# EAGLE board PIC32Circuit (EAGLE 7.5.0)
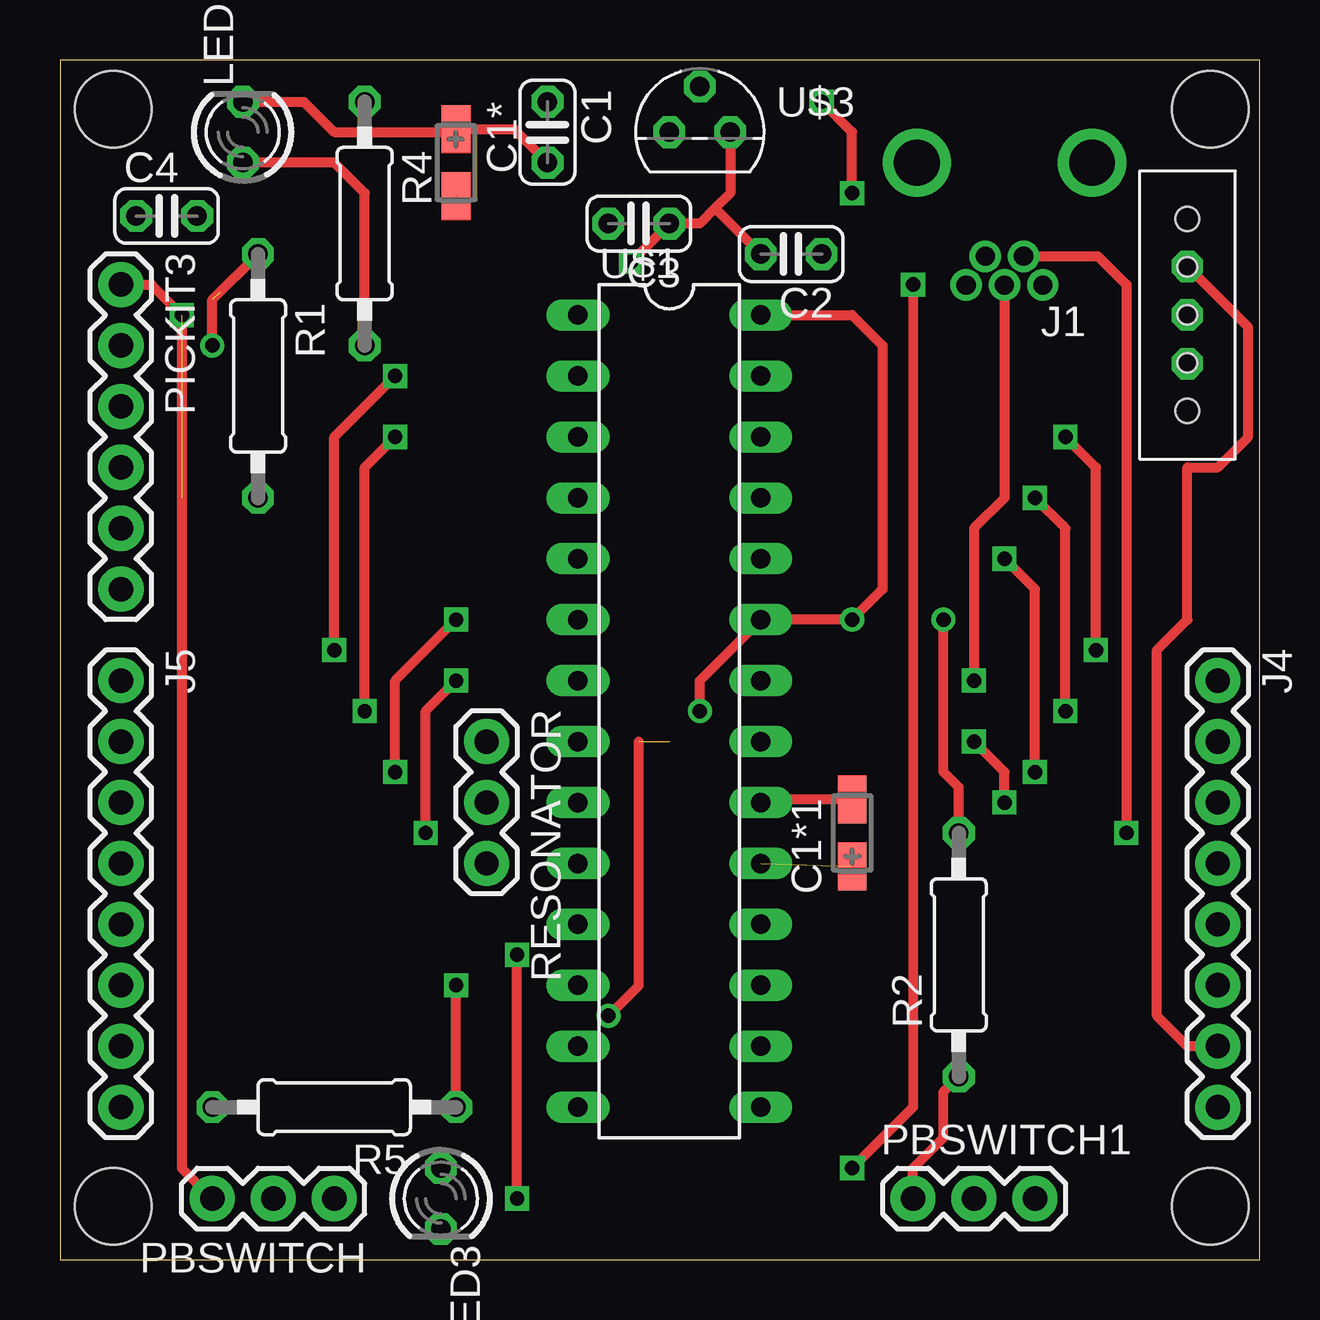
[diagram p0: board, top side]
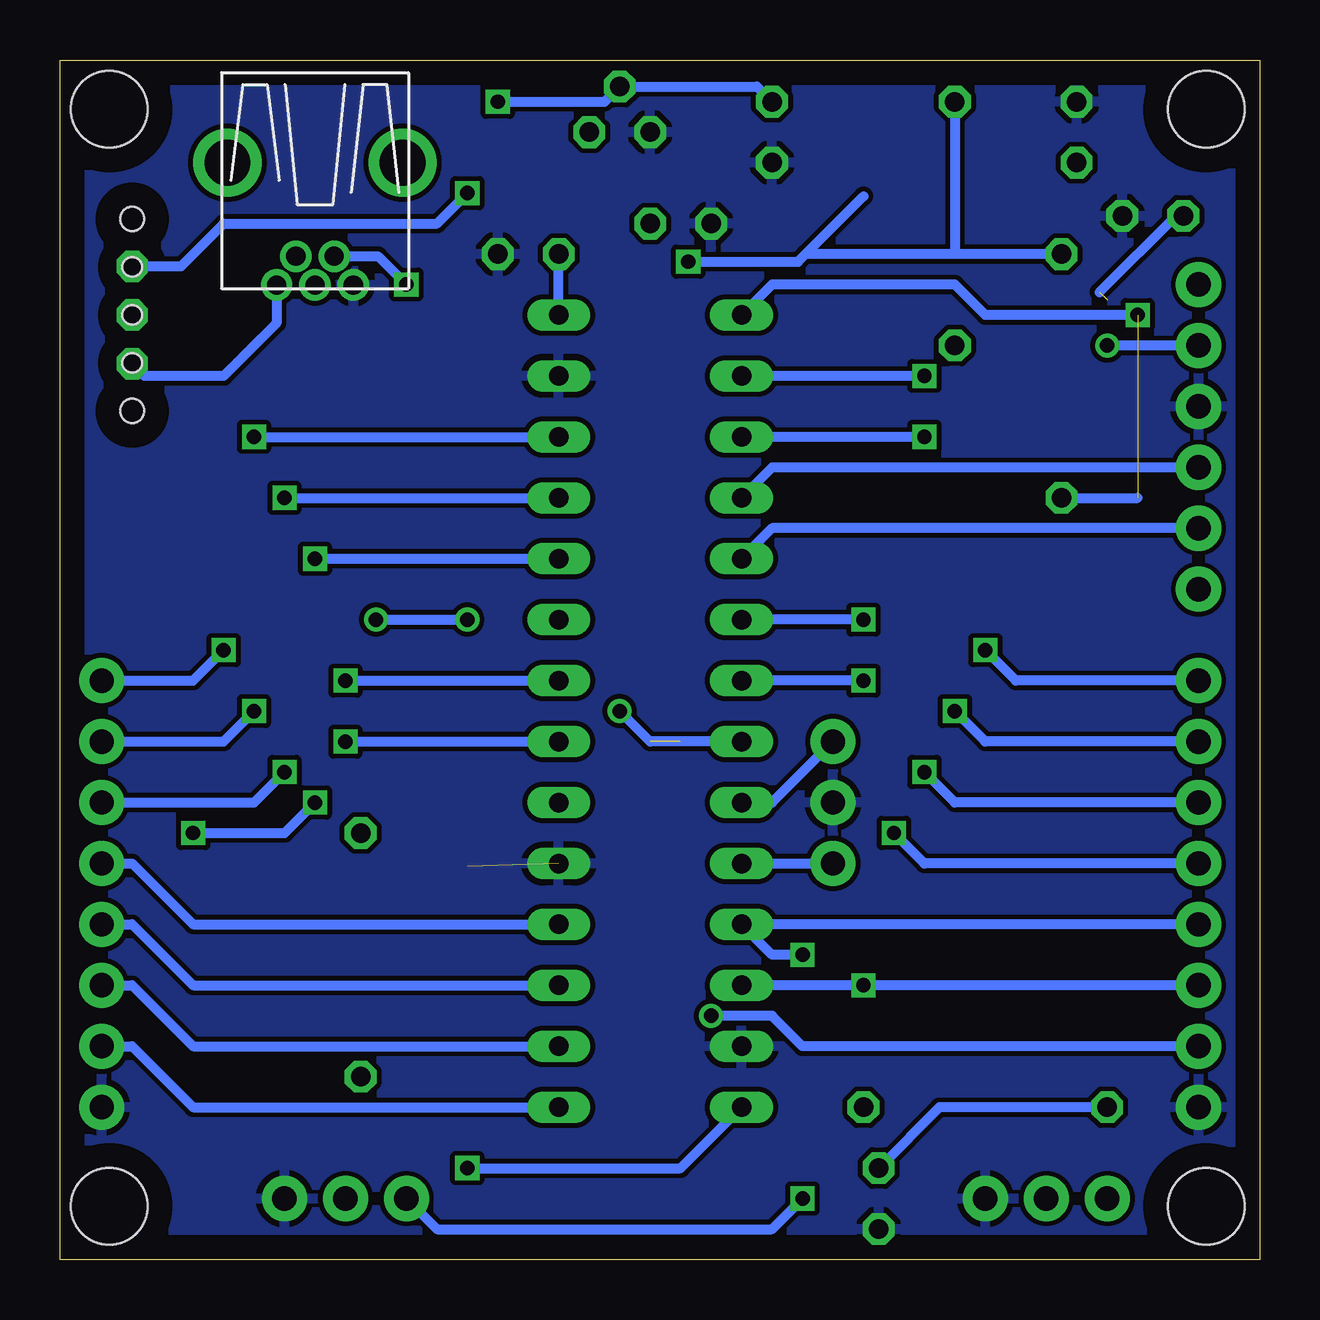
[diagram p1: board, bottom side, seen from below]

Size 50 x 50 mm. Coordinates in mm from the lower left corner, seen from the top.
Outline: 0,0 50,0 50,50 0,50 0,0
Copper layers (1*16): Top 0.035mm / dielectric 1.5mm / Bottom 0.035mm
Design rules "default": minimum track width 10mil, minimum drill 24mil, track to track 8mil, track to pad 8mil, pad to pad 8mil, via to via 8mil, smd to smd 8mil, copper to edge 40mil, drill to drill 8mil, minimum pad ring 10mil, minimum via ring 8mil, stop-mask expansion 4mil, vias tented up to drill 0mil, thermal gap 10mil
Holes 3.2 mm at 2.22,2.22 47.94,2.22 2.22,47.94 47.94,47.94

## Footprints (pad centres in the part's own frame; a part is rotated, then mirrored left to right if it is on the bottom)
C025-024X044 = drill 0.813 octagon: 1 -1.27,0; 2 1.27,0
CT3216 = smd 2 x 1.2: + -1.4,0; - 1.4,0
USB-MB-H = drill 0.8: D+ 5.1,0; D- 3.9,0.8; GND 5.1,-1.6; ID 3.9,-0.8; VBUS 5.1,1.6 | drill 1.9: P$6 0,-3.65; P$7 0,3.65
1X08_ROUND = drill 1.016 pad 1.88: 1 0,0; 2 2.54,0; 3 5.08,0; 4 7.62,0; 5 10.16,0; 6 12.7,0; 7 15.24,0; 8 17.78,0
LED3MM = drill 0.813 octagon: A -1.27,0; K 1.27,0
1X03 = drill 1.016 pad 1.88: 1 0,0; 2 2.54,0; 3 5.08,0
1X06 = drill 1.016 pad 1.88: 1 0,0; 2 2.54,0; 3 5.08,0; 4 7.62,0; 5 10.16,0; 6 12.7,0
0207/10 = drill 0.813 octagon: 1 -5.08,0; 2 5.08,0
DIL28-3 = drill 0.813 long: 1 -16.51,-3.81; 2 -13.97,-3.81; 3 -11.43,-3.81; 4 -8.89,-3.81; 5 -6.35,-3.81; 6 -3.81,-3.81; 7 -1.27,-3.81; 8 1.27,-3.81; 9 3.81,-3.81; 10 6.35,-3.81; 11 8.89,-3.81; 12 11.43,-3.81; 13 13.97,-3.81; 14 16.51,-3.81; 15 16.51,3.81; 16 13.97,3.81; 17 11.43,3.81; 18 8.89,3.81; 19 6.35,3.81; 20 3.81,3.81; 21 1.27,3.81; 22 -1.27,3.81; 23 -3.81,3.81; 24 -6.35,3.81; 25 -8.89,3.81; 26 -11.43,3.81; 27 -13.97,3.81; 28 -16.51,3.81
SLIDERSWITCH = drill 0.8 octagon: P$1 0,0; P$2 0,2.032; P$3 0,-2.032 | hole 0.8: 0,2; 0,-2; 0,0 | hole 1: 0,-4; 0,4
TO92 = drill 0.813 octagon: 1 -1.27,0; 2 0,1.905; 3 1.27,0

## Placement (x,y rotation side)
C1  [C025-024X044]  20.32,46.99 270 top
C1*  [CT3216]  16.51,45.72 270 top
C1*1  [CT3216]  33.02,17.78 90 top
C2  [C025-024X044]  30.48,41.91 180 top
C3  [C025-024X044]  24.13,43.18 180 top
C4  [C025-024X044]  4.45,43.5 0 top
J1  USB-MB-H  [USB-MB-H]  39.37,45.72 270 top
J4  [1X08_ROUND]  48.26,24.13 270 top
J5  [1X08_ROUND]  2.54,24.13 270 top
LED1  [LED3MM]  7.62,46.99 90 top
LED3  [LED3MM]  15.88,2.54 270 top
PBSWITCH  [1X03]  11.43,2.54 180 top
PBSWITCH1  [1X03]  35.56,2.54 0 top
PICKIT3  [1X06]  2.54,40.64 270 top
R1  [0207/10]  8.26,36.83 270 top
R2  [0207/10]  37.47,12.7 90 top
R4  [0207/10]  12.7,43.18 270 top
R5  [0207/10]  11.43,6.35 180 top
RESONATOR  [1X03]  17.78,21.59 270 top
U$1  PIC32MX250F128B  [DIL28-3]  25.4,22.86 270 top
U$2  SLIDERSWITCH  [SLIDERSWITCH]  46.99,39.37 0 top
U$3  MCP1702  [TO92]  26.67,46.99 0 top

## Library data of the parts
C1 C1* C1*1 C2-C4 J1 PBSWITCH PBSWITCH1 RESONATOR U$1-U$3 = PIC32
J4 J5 PICKIT3 = PIC32; PROD_ID: CONN-08437
LED1 LED3 = led
R1 R2 R4 R5 = resistor

## Nets
3V3: C1*.- C2.2 C3.1 C4.1 J5.7 PICKIT3.2 R1.1 R2.2 R4.1 U$1.8 U$1.23 U$1.28 U$3.3
5V: C1.1 J4.7 U$1.15 U$2.P$2 U$3.2
A0: J5.1 U$1.2
A1: J5.2 U$1.3
A4: J5.6 R5.1 U$1.12
B2: J5.3 U$1.6
B3: J5.4 U$1.7
B4: J5.5 PBSWITCH1.1 R2.1 U$1.11
B7: J4.6 U$1.16
B8: J4.5 U$1.17
B9: J4.4 U$1.18
B13: J4.3 U$1.24
B14: J4.2 U$1.25
B15: J4.1 U$1.26
D+: J1.D+ U$1.22
D-: J1.D- U$1.21
GND: C1*1.+ C1*.+ C1.2 C2.1 C3.2 C4.2 J1.GND J4.8 J5.8 LED1.K LED3.K PBSWITCH1.3 PBSWITCH.1 PICKIT3.3 RESONATOR.2 U$1.13 U$1.19 U$1.27 U$3.1
ID: J1.ID U$1.14
MCLR: PBSWITCH.3 PICKIT3.1 R1.2 U$1.1
N$2: LED1.A R4.2
N$3: C1*1.- U$1.20
N$4: J1.VBUS U$2.P$3
N$5: LED3.A R5.2
OSC1: RESONATOR.1 U$1.9
OSC2: RESONATOR.3 U$1.10
PGC: PICKIT3.5 U$1.5
PGD: PICKIT3.4 U$1.4

## Tracks (layer width: path | path; a pad name or v marks a point on that pad's centre or on a via)
3V3  (via drill 0.6)  (3 unrouted)
  Top 0.406: U$3.3 27.94,44.45 27.3,43.81 | 27.3,43.81 26.67,43.18 C3.1 v23.81,41.59 | v6.35,38.1 6.35,40.01 R1.1 | C2.2 27.3,43.81 | U$1.28 33.02,39.37 34.29,38.1 34.29,27.94 v33.02,26.67 U$1.23 26.67,24.13 v26.67,22.86 | v22.86,10.16 24.13,11.43 24.13,21.59 | R2.2 37.47,19.68 36.83,20.32 v36.83,26.67
  Bottom 0.406: U$1.28 C2.2 | v23.81,41.59 19.24,41.59 18.92,41.91 | 18.92,41.91 C1*.- | PICKIT3.2 v6.35,38.1 | R1.1 12.7,41.91 | 12.7,41.91 18.92,41.91 | R4.1 12.7,41.91 | U$1.8 25.4,21.59 v26.67,22.86 | J5.7 19.05,8.89 20.32,10.16 v22.86,10.16 | v36.83,26.67 v33.02,26.67 | C4.1 3.49,43.5 6.67,40.32
5V  (via drill 0.6)
  Top 0.406: J4.7 46.99,8.89 45.72,10.16 45.72,25.4 46.99,26.67 46.99,33.02 48.26,33.02 49.53,34.29 49.53,38.86 U$2.P$2 | v33.02,44.45 33.02,46.99 v31.75,48.26
  Bottom 0.406: J4.7 46.99,8.89 44.45,6.35 U$1.15 | U$2.P$2 44.96,41.4 43.18,43.18 34.29,43.18 v33.02,44.45 | v31.75,48.26 27.3,48.26 U$3.2 20.95,48.9 C1.1
A0  (via drill 0.6)
  Top 0.406: v11.43,25.4 11.43,34.29 v13.97,36.83
  Bottom 0.406: J5.1 10.16,24.13 v11.43,25.4 | v13.97,36.83 U$1.2
A1  (via drill 0.6)
  Top 0.406: v12.7,22.86 12.7,33.02 v13.97,34.29
  Bottom 0.406: J5.2 11.43,21.59 v12.7,22.86 | v13.97,34.29 U$1.3
A4  (via drill 0.6)
  Top 0.406: R5.1 v16.51,11.43
  Bottom 0.406: J5.6 v16.51,11.43 U$1.12
B2  (via drill 0.6)
  Top 0.406: v13.97,20.32 13.97,24.13 v16.51,26.67
  Bottom 0.406: J5.3 12.7,19.05 v13.97,20.32 | v16.51,26.67 U$1.6
B3  (via drill 0.6)
  Top 0.406: v15.24,17.78 15.24,22.86 v16.51,24.13
  Bottom 0.406: J5.4 13.97,16.51 v15.24,17.78 | v16.51,24.13 U$1.7
B4  (via drill 0.6)
  Top 0.406: v19.05,2.54 v19.05,12.7 | PBSWITCH1.1 35.56,3.81 36.83,5.08 36.83,6.99 R2.1
  Bottom 0.406: PBSWITCH1.1 34.29,1.27 20.32,1.27 v19.05,2.54 | v19.05,12.7 20.32,12.7 U$1.11 J5.5
B7
  Bottom 0.406: J4.6 46.99,11.43 44.45,8.89 U$1.16
B8
  Bottom 0.406: J4.5 46.99,13.97 44.45,11.43 U$1.17
B9
  Bottom 0.406: J4.4 46.99,16.51 44.45,13.97 U$1.18
B13  (via drill 0.6)
  Top 0.406: v40.64,20.32 40.64,27.94 v39.37,29.21
  Bottom 0.406: J4.3 41.91,19.05 v40.64,20.32 | v39.37,29.21 U$1.24
B14  (via drill 0.6)
  Top 0.406: v41.91,22.86 41.91,30.48 v40.64,31.75
  Bottom 0.406: J4.2 43.18,21.59 v41.91,22.86 | v40.64,31.75 U$1.25
B15  (via drill 0.6)
  Top 0.406: v43.18,25.4 43.18,33.02 v41.91,34.29
  Bottom 0.406: J4.1 44.45,24.13 v43.18,25.4 | v41.91,34.29 U$1.26
D+  (via drill 0.6)
  Top 0.406: J1.D+ 39.37,31.75 38.1,30.48 v38.1,24.13
  Bottom 0.406: v38.1,24.13 U$1.22
D-  (via drill 0.6)
  Top 0.406: J1.D- 43.27,41.82 44.45,40.64 v44.45,17.78 | v39.37,19.05 39.37,20.32 v38.1,21.59
  Bottom 0.406: v44.45,17.78 40.64,17.78 v39.37,19.05 | v38.1,21.59 U$1.21
GND  (1 unrouted)
  Top 0.406: C1.2 18.92,47.12 C1*.+ 16.51,46.99 11.43,46.99 10.16,48.26 LED1.K
  pour Bottom: 0,49.53 50.8,49.53 50.8,0 0,0
ID  (via drill 0.6)
  Top 0.406: v35.56,40.64 35.56,6.35 v33.02,3.81
  Bottom 0.406: J1.ID 36.74,41.82 v35.56,40.64 | v33.02,3.81 24.13,3.81 U$1.14
MCLR  (via drill 0.6)  (1 unrouted)
  Top 0.406: PICKIT3.1 3.81,40.64 v5.08,39.37 5.08,3.81 PBSWITCH.3
  Bottom 0.406: v5.08,39.37 11.43,39.37 12.7,40.64 20.32,40.64 U$1.1 | R1.2 5.08,31.75
N$2
  Top 0.406: R4.2 12.7,44.45 11.43,45.72 LED1.A
N$3
  Top 0.406: C1*1.- 29.34,19.18 U$1.20
N$4
  Bottom 0.406: J1.VBUS 40.97,39.04 43.18,36.83 46.48,36.83 U$2.P$3
N$5
  Bottom 0.406: R5.2 13.34,6.35 LED3.A
OSC1
  Bottom 0.406: U$1.9 20.32,19.05 RESONATOR.1
OSC2
  Bottom 0.406: U$1.10 RESONATOR.3
PGC
  Bottom 0.406: PICKIT3.5 20.32,30.48 U$1.5
PGD
  Bottom 0.406: PICKIT3.4 20.32,33.02 U$1.4